# Altium PCB Copy of djb_v2_jig_b.PcbDoc
Units mm, origin at the board's own origin, x right, y up, seen from the top; angles counter-clockwise.
Board outline 37 x 33.95 mm, 2 copper layers (Top Layer, Bottom Layer); 14 components, 9 nets, 14 pads, 0 vias.
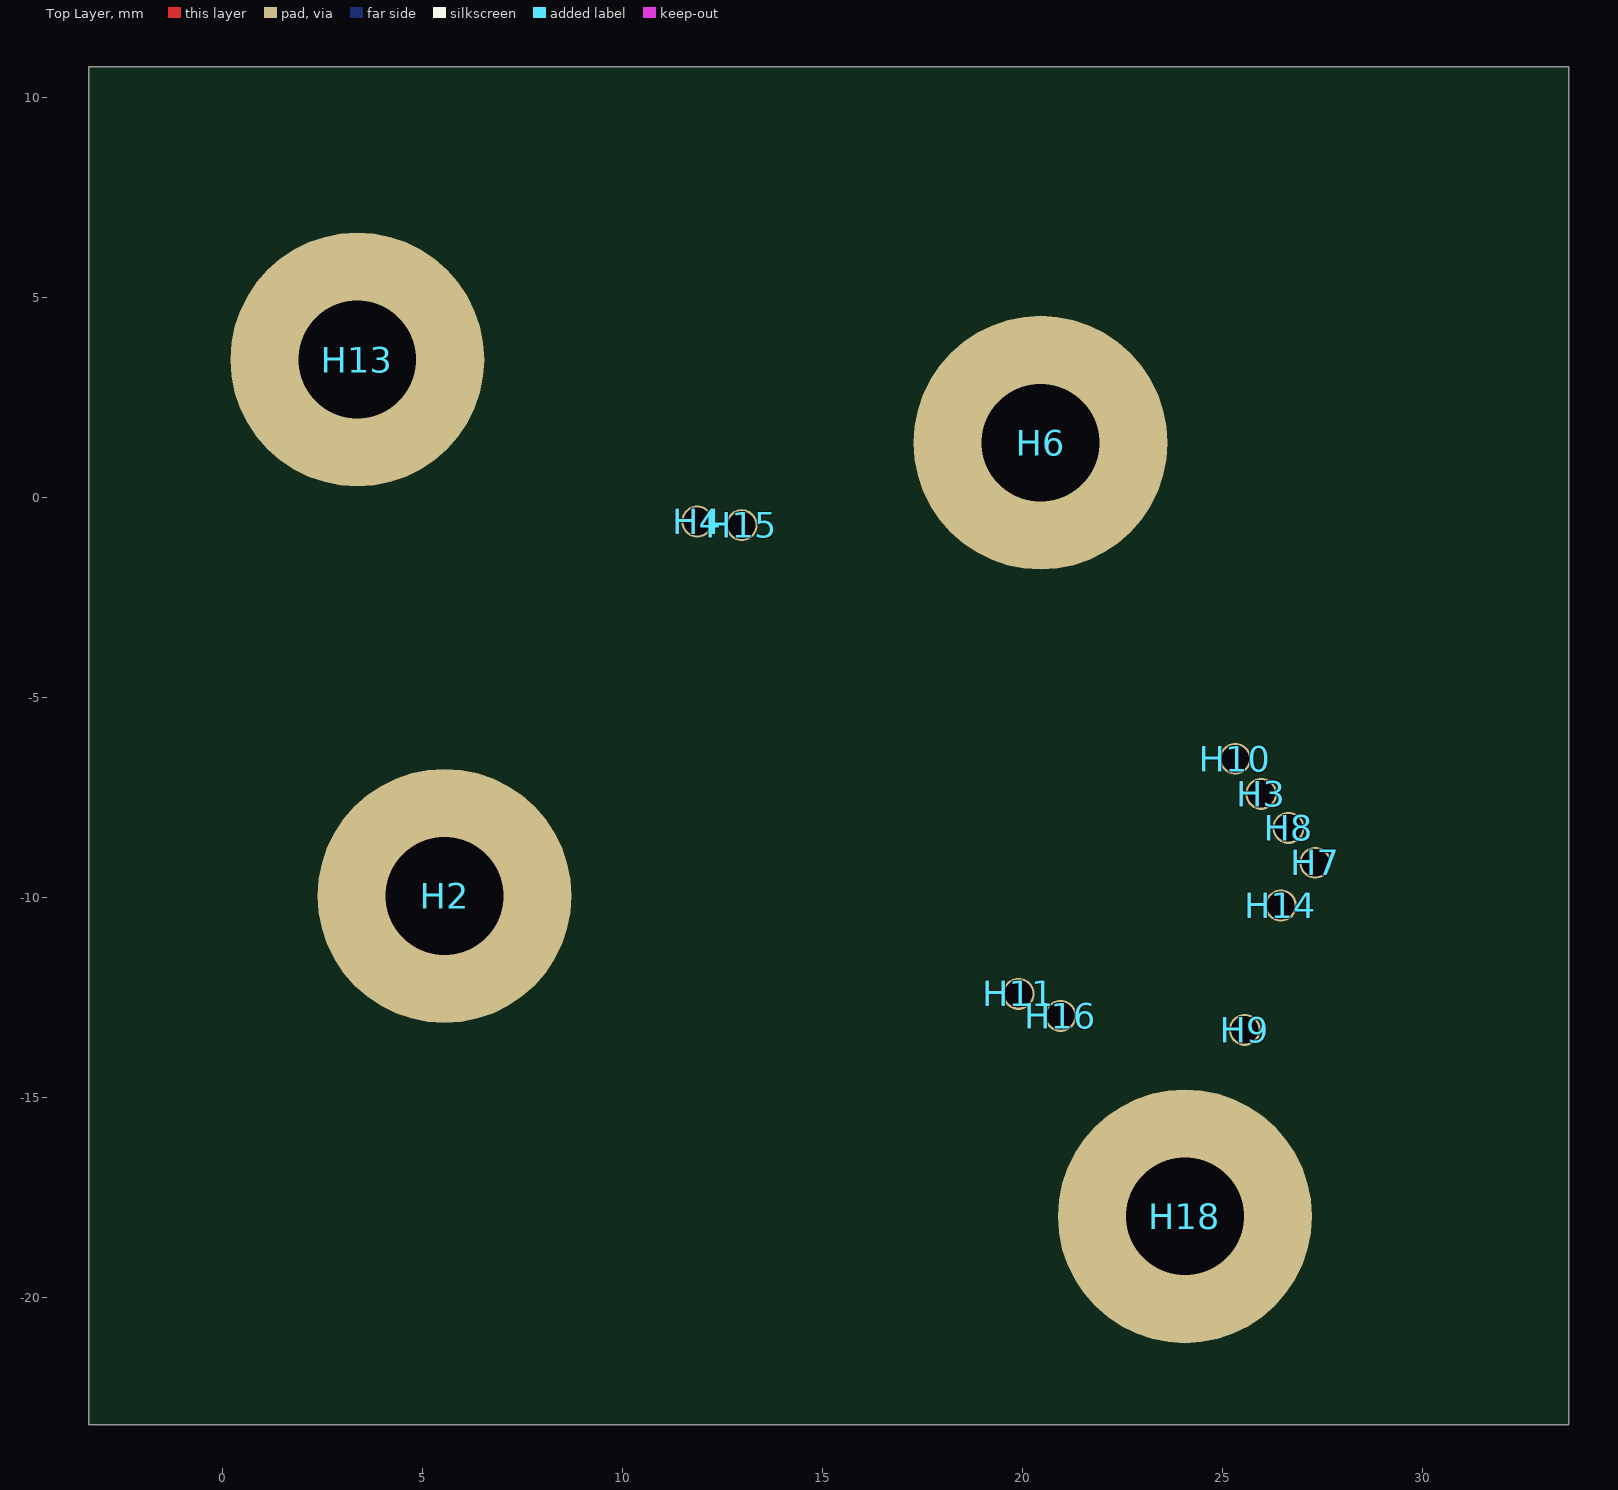
[diagram p0: Top Layer view]
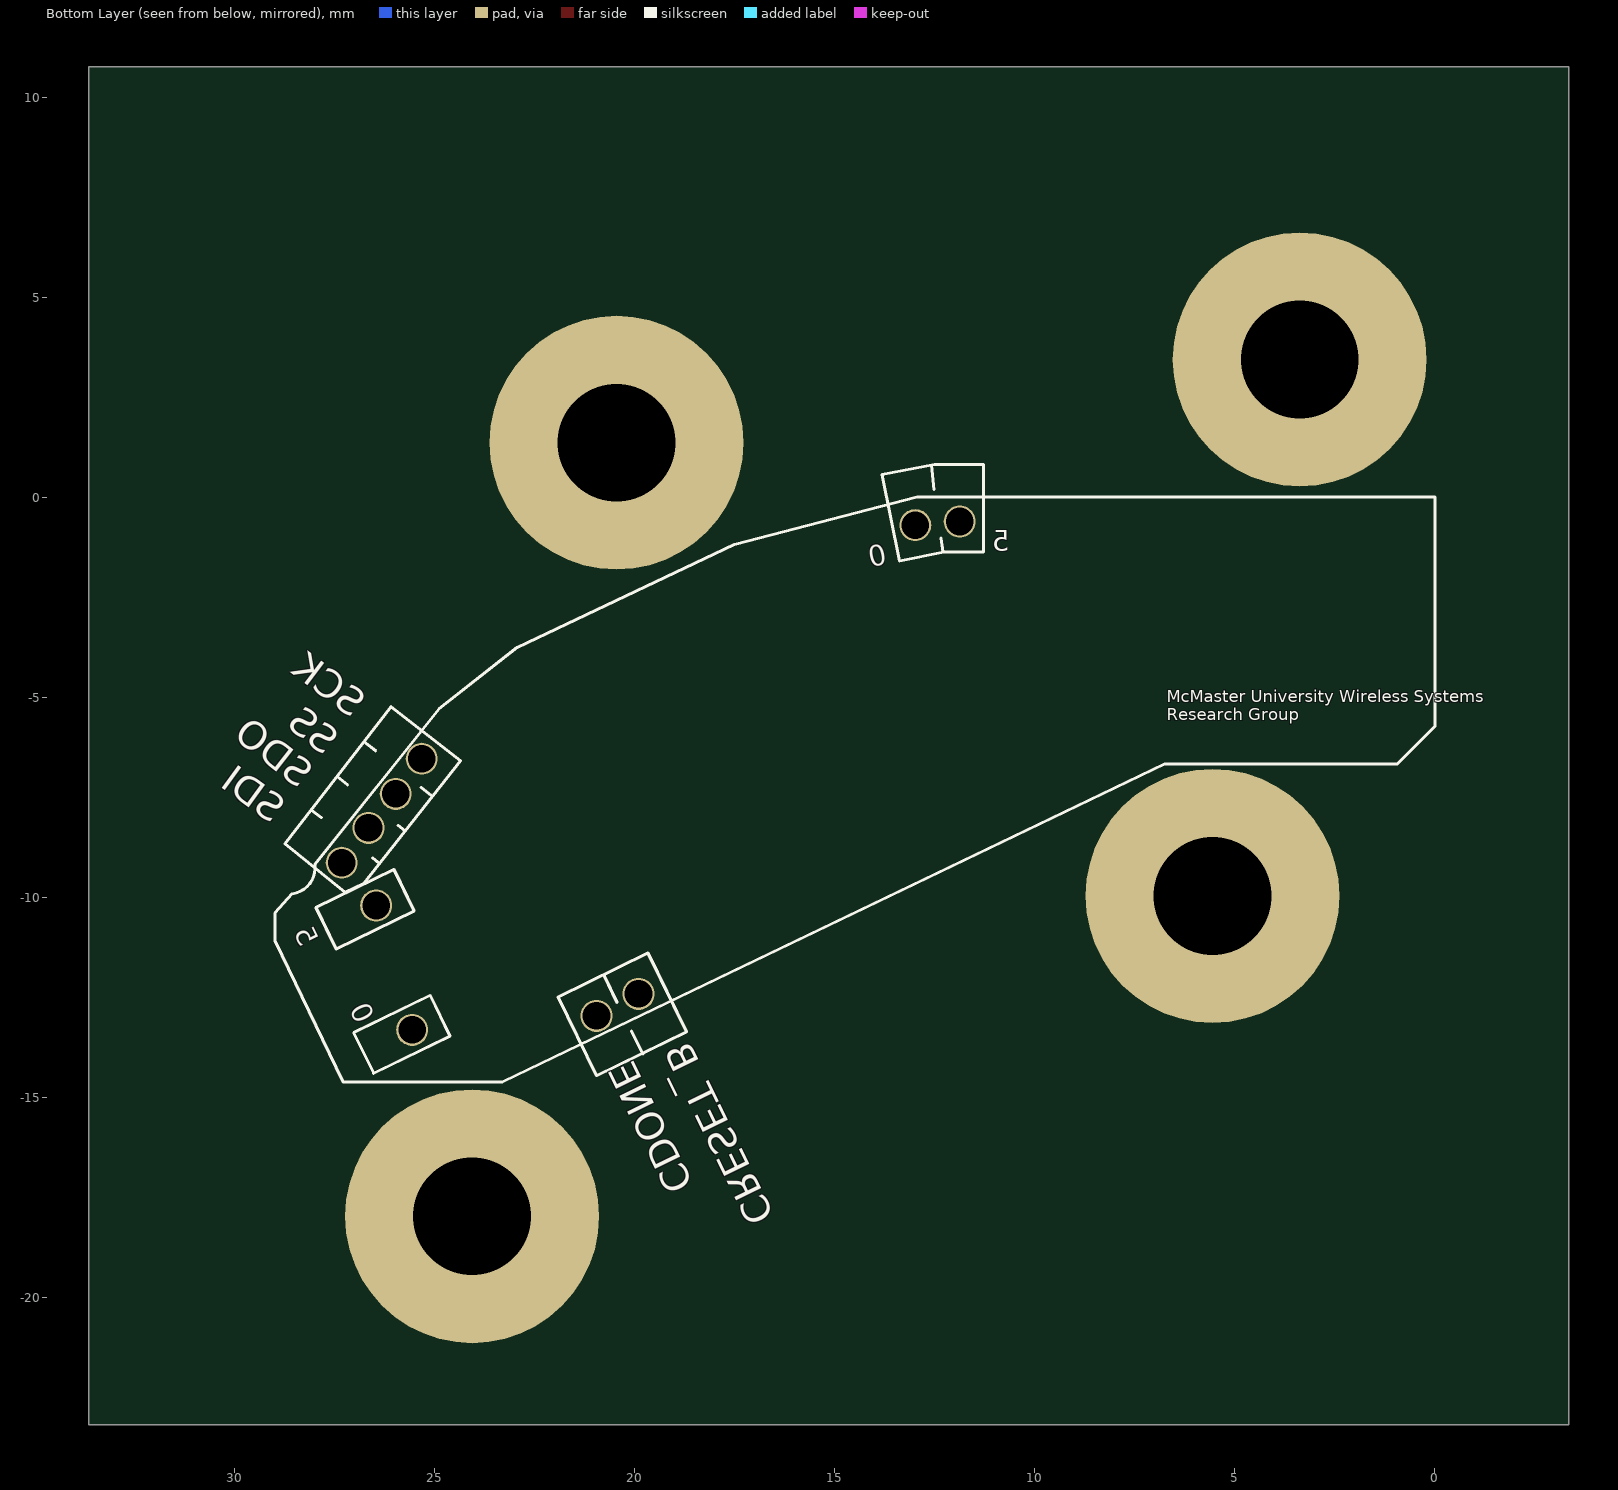
[diagram p1: Bottom Layer view, seen from below]

## Layer stack, top to bottom
Top Solder: solder mask 0.0102, Solder Resist, Dk 3.5
Top Layer: signal copper 0.0356
Dielectric 1: dielectric 0.32, FR-4, Dk 4.8
Bottom Layer: signal copper 0.0356
Bottom Solder: solder mask 0.0102, Solder Resist, Dk 3.5

## Board outline
-3.34,-23.185 33.66,-23.185 33.66,10.765 -3.34,10.765

## Design rules (kind name [scope] priority, off if disabled: settings)
Clearance [All] p1: gap=0.178 ignorepadtopadclearanceinfootprint=FALSE
ComponentClearance [All] p1: gap=0.025 collisioncheckmode=3 verticalgap=0.025 showdistances=TRUE
HoleSize [All] p1: absolutevalues=TRUE maxlimit=5.08 minlimit=0.254 maxpercent=80.000 minpercent=20.000
MinimumSolderMaskSliver [All] p1: minsoldermaskwidth=0.127
PolygonConnect [All] p1: connectstyle=Relief reliefconductorwidth=0.254 reliefentries=4 polygonreliefangle="90 Angle" airgapwidth=0.254
RoutingVias [All] p1: holewidth=0.51 width=0.8 viastyle="Through Hole" minholewidth=0.51 minwidth=0.8 maxholewidth=0.51 maxwidth=0.8
SilkToSilkClearance [All] p1: silktosilkclearance=0
SilkToSolderMaskClearance [IsPad] p1: minsilkscreentomaskgap=0 clearancetoexposedcopper=TRUE
SolderMaskExpansion [All] p1: expansion=0.102 istentingtop=FALSE
Width [All] p1: maxlimit=1.27 minlimit=0.254 preferedwidth=0.254 minimp=50.000000 maximp=50.000000 favimp=50.000000
25 further rules are at their usual default settings.

## Classes and differential pairs
component class djb_v2_jig: H2 H3 H4 H7 H8 H9 H14 H18

## Components (designator, comment, footprint, x,y, rotation, side; value= is the part's Value field where it differs from the comment)
H2 "Spacer_hole_4-40" SPACER_HOLE_4-40 5.56,-9.97 r0 top
H3 "SMITHS_S-00-U-1.3_hole" SMITHS_S-00-U-1.3_hole 25.98,-7.42 r0 top
H4 "SMITHS_S-00-U-1.3_hole" SMITHS_S-00-U-1.3_hole 11.88,-0.61 r0 top
H6 "Spacer_hole_4-40" SPACER_HOLE_4-40 20.46,1.36 r0 top
H7 "SMITHS_S-00-U-1.3_hole" SMITHS_S-00-U-1.3_hole 27.33,-9.14 r0 top
H8 "SMITHS_S-00-U-1.3_hole" SMITHS_S-00-U-1.3_hole 26.66,-8.27 r0 top
H9 "SMITHS_S-00-U-1.3_hole" SMITHS_S-00-U-1.3_hole 25.57,-13.32 r0 top
H10 "SMITHS_S-00-U-1.3_hole" SMITHS_S-00-U-1.3_hole 25.33,-6.54 r90 top
H11 "SMITHS_S-00-U-1.3_hole" SMITHS_S-00-U-1.3_hole 19.91,-12.42 r90 top
H13 "Spacer_hole_4-40" SPACER_HOLE_4-40 3.38,3.44 r0 top
H14 "SMITHS_S-00-U-1.3_hole" SMITHS_S-00-U-1.3_hole 26.47,-10.21 r90 top
H15 "SMITHS_S-00-U-1.3_hole" SMITHS_S-00-U-1.3_hole 12.99,-0.7 r90 top
H16 "SMITHS_S-00-U-1.3_hole" SMITHS_S-00-U-1.3_hole 20.96,-12.97 r90 top
H18 "Spacer_hole_4-40" SPACER_HOLE_4-40 24.07,-17.98 r0 top

## Footprints (in the part's own frame and the unit in brackets; to place one, negate y for a bottom-side part, rotate by r counter-clockwise, add the part's x,y. Pads: shape width x height; smd on the part's side, far side on the other; paste and mask are expansions set on the pad)
SMITHS_S-00-U-1.3_hole [mm] "Smiths Interconnect / IDI S-00-U-1.3-G Pogo Pin 0.99mm Centers 16.7mm Long 2.8mm Travel, Mid Mount"
  round 0.8 hole 0.69: 1(0,0)
  body extent -0.02,0.36 0.02,0.39, height 0.01
SPACER_HOLE_4-40 [mil] "Hole for 4-40 screw"
  round 250 hole 116 paste-39370.1 mask-39370.1: 0(0,0)

## Part data
H2 H6 H13 H18: "Spacer hole w/o screw"
H3 H4 H7 H8 H9 H10 H11 H14 H15 H16: "Smiths Interconnect / IDI S-00-U-1.3-G Pogo Pin 0.99mm Centers 16.7mm Long 2.8mm Travel, Mid Mount"

## Nets (pads, with @x,y where several pads share a name; then routed paths per layer and width w, separated by ;. In a path a pad name is that pad's centre, name@x,y a point inside that pad or via, vN(x,y) a via of type N, cw(c..) or ccw(c..) an arc to the next point about the centre after c; other vN are vias at no path point)
+3V3: 
+5V: 
CDONE: 
CRESET_B: 
GND: 
SCK: 
SDI: 
SDO: 
SS: 
pads on no net: H2.0 H3.1 H4.1 H6.0 H7.1 H8.1 H9.1 H10.1 H11.1 H13.0 H14.1 H15.1 H16.1 H18.0

## Silkscreen, mask and mechanical layers (free items; w line width, h text height)
Bottom Overlay:
  lines w0.076: 12.3,-1.375 12.35,-1.028 ; 12.52,0.185 12.59,0.795 ; 19.8,-13.925 20.09,-13.345 ; 20.45,-12.635 20.77,-11.955 ; 25.08,-7.465 25.35,-7.255 ; 25.747,-8.342 25.918,-8.205 ; 26.38,-9.165 26.564,-9.02 ; 26.48,-6.345 26.77,-6.115 ; 27.19,-7.195 27.44,-6.995 ; 27.83,-8.015 28.08,-7.825 ; -0.002,-5.731 -0.002,0.008 12.945,0.008 17.514,-1.184 22.942,-3.759 24.898,-5.292 28.001,-9.189 ccw(c28.651,-9.267) 28.573,-9.917 28.998,-10.392 28.998,-11.092 27.298,-14.617 23.306,-14.617 6.748,-6.667 0.934,-6.667 -0.002,-5.731 ; 11.28,-1.375 11.28,0.815 12.515,0.815 13.828,0.56 13.384,-1.591 12.273,-1.375 11.28,-1.375 ; 18.714,-13.369 19.675,-11.398 21.922,-12.494 20.96,-14.465 18.714,-13.369 ; 24.36,-6.588 26.094,-5.237 28.752,-8.671 27.251,-9.877 26.776,-9.662 24.36,-6.588 ; 24.621,-13.474 25.117,-12.456 27.027,-13.387 26.53,-14.405 24.621,-13.474 ; 25.521,-10.344 26.026,-9.308 27.975,-10.259 27.47,-11.295 25.521,-10.344
  text "5" at 10.63,-1.335 h0.51
  text "0" at 14.1,-1.755 h0.51 r348
  text "SCK" at 27.08,-5.535 h0.7 r37
  text "McMaster University Wireless Systems / Research Group" at 6.705,-5.58 h0.3
  text "SS" at 27.77,-6.475 h0.7 r38
  text "SDO" at 28.41,-7.305 h0.7 r38
  text "SDI" at 29.08,-8.175 h0.7 r36
  text "5" at 28.34,-11.275 h0.51 r64
  text "0" at 27.14,-12.805 h0.51 r64
  text "CDONE" at 19.16,-17.485 h0.7 r64
  text "CRESET_B" at 17.13,-18.275 h0.7 r64
Mechanical 3:
  the board outline again, w0.2